# Altium PCB Copy of PCB1.PcbDoc
Units mil, origin at the board's own origin, x right, y up, seen from the top; angles counter-clockwise.
Board outline 2585 x 4135 mil, 2 copper layers (Top Layer, Bottom Layer); 71 components, 60 nets, 219 pads, 31 vias.
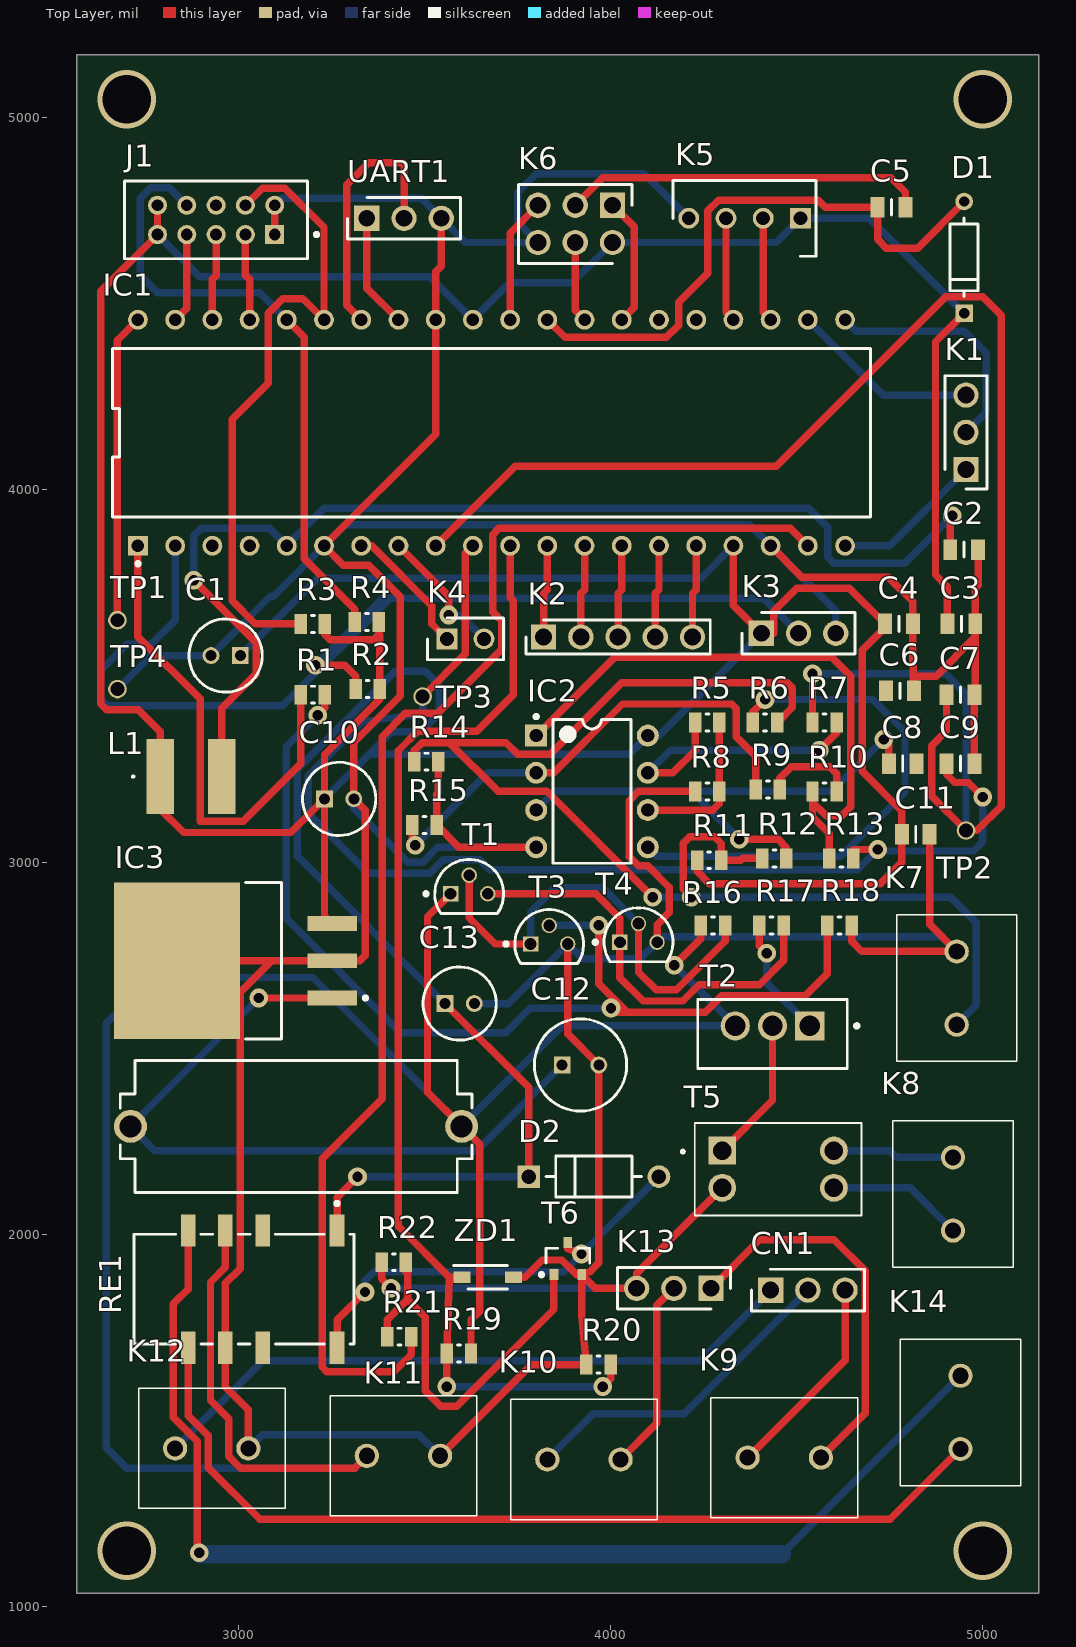
[diagram p0: Top Layer view]
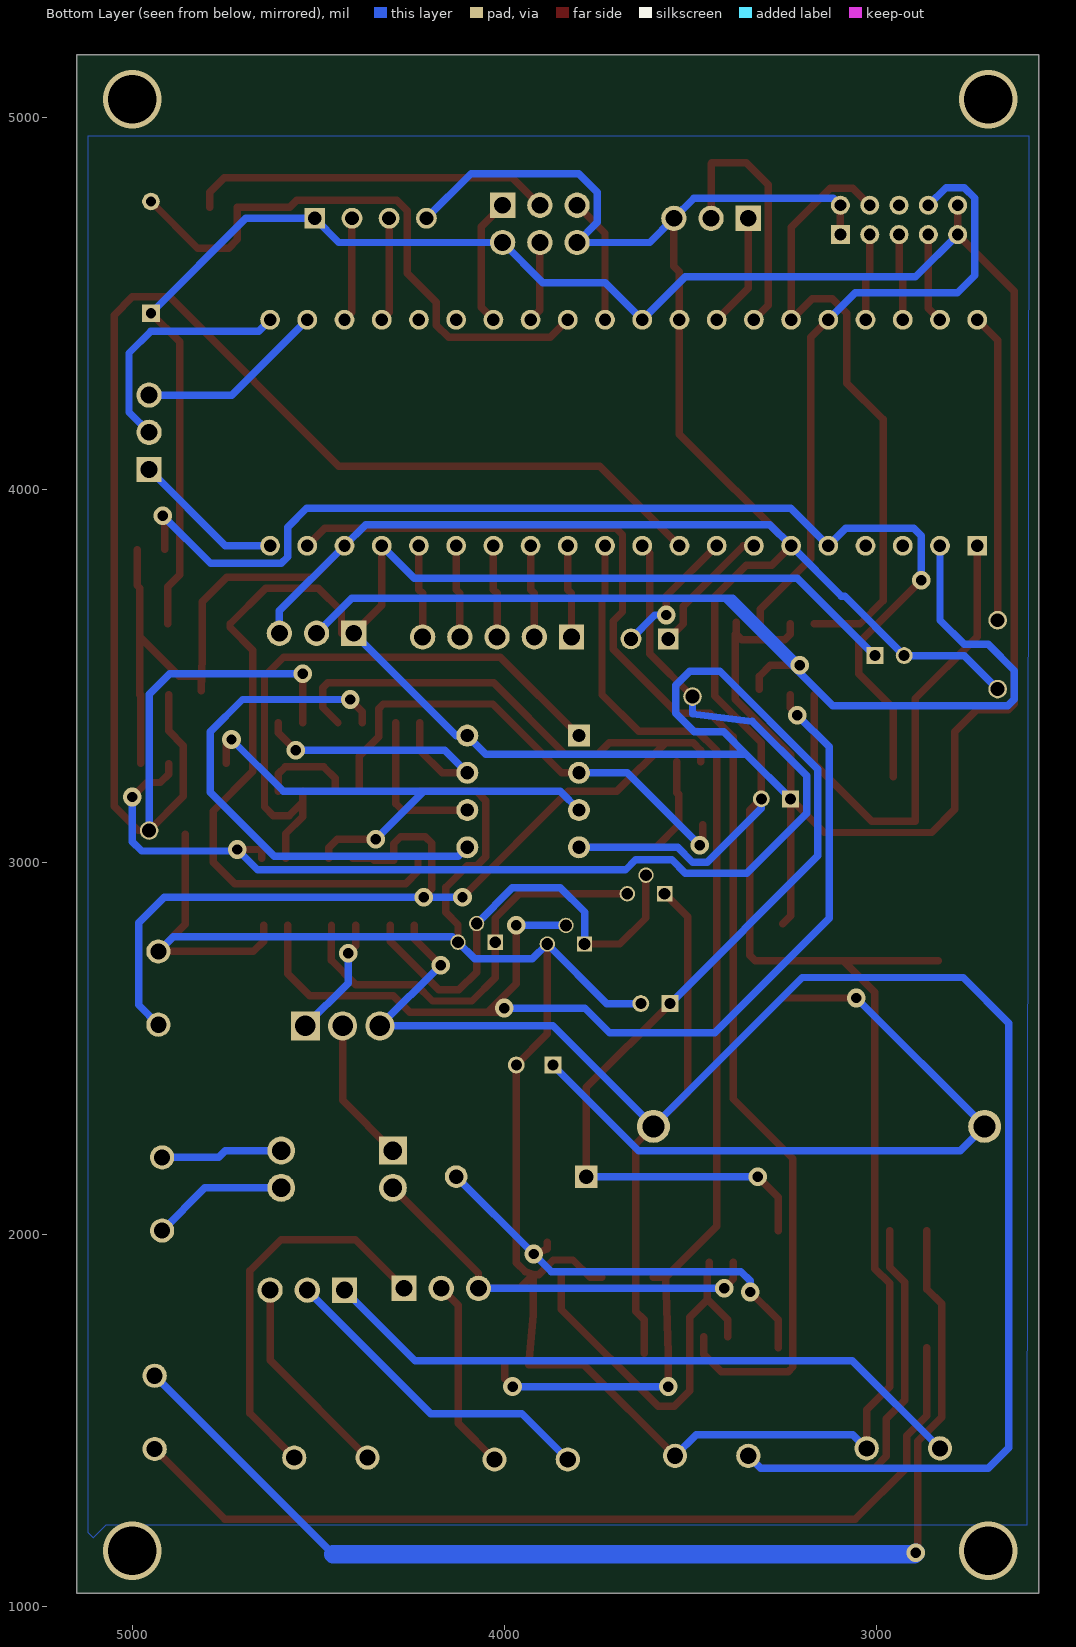
[diagram p1: Bottom Layer view, seen from below]

## Layer stack, top to bottom
Top Solder: solder mask 0.4, Solder Resist, Dk 3.5
Top Layer: signal copper 1.4
Dielectric 1: dielectric 12.6, FR-4, Dk 4.8
Bottom Layer: signal copper 1.4
Bottom Solder: solder mask 0.4, Solder Resist, Dk 3.5

## Board outline
2565,1035 5150,1035 5150,5170 2565,5170

## Design rules (kind name [scope] priority, off if disabled: settings)
Clearance [All] p1: gap=10 ignorepadtopadclearanceinfootprint=FALSE
PolygonConnect [All] p1: connectstyle=Relief reliefconductorwidth=10 reliefentries=4 polygonreliefangle="90 Angle" airgapwidth=10
RoutingVias [All] p1: holewidth=28 width=50 viastyle="Through Hole" minholewidth=28 minwidth=50 maxholewidth=28 maxwidth=50
SolderMaskExpansion [All] p1: expansion=4 istentingtop=FALSE
Width [All] p1: maxlimit=50 minlimit=15 preferedwidth=20 minimp=50.000000 maximp=50.000000 favimp=50.000000
30 further rules are at their usual default settings.

## Classes and differential pairs
component class soldeer: K8 R16 R17 R18 T1 T2 T3 T4 T5
component class IC2: C6 C7 C8 C9 C10 C11 IC2 K7 R5 R6 R7 R8 R9 R10 R11 R12 R13 R14 R15 TP2 TP3 TP4
component class CPU: C1 C2 C3 C4 C5 D1 IC1 J1 K1 K2 K3 K4 K5 K6 L1 R1 R2 R3 R4 TP1 UART1

## Components (designator, comment, footprint, x,y, rotation, side; value= is the part's Value field where it differs from the comment)
C1 "10uf 50V" "Elco 10uF 50V" 3005,3555 r180 top
C2 "100 nF" 0805 4950,3840 r0 top
C3 "100 nF" 0805 4942.4,3640 r0 top
C4 "100 nF" 0805 4775,3640 r0 top
C5 "100 nF" 0805 4755,4760 r0 top
C6 "10 nF" 0805 4777.4,3460 r0 top
C7 "10 nF" 0805 4940,3450 r0 top
C8 "10 nF" 0805 4785,3265 r0 top
C9 "10 nF" 0805 4940,3265 r0 top
C10 "10u 50V" "Elco 10uF 50V" 3231.26,3170 r0 top
C11 "10 nF" 0805 4820,3075 r0 top
C12 "100uF 25V" "Elco 100uF 25V" 3870,2455 r0 top
C13 "10uf 50V" "Elco 10uF 50V" 3555,2620 r0 top
CN1 "5-146280-3" "3 Pin Header" 4430,1850 r0 top
D1 "1N4148" 1N4148 4950,4625 r90 top
D2 "1N4007" 1N4007 3955,2155 r0 top value=15pF
IC1 "ATMEGA4809-PF" FP-C04-016-MFG 3680,4153.75 r90 top
IC2 "MCP6002-E/P" MCP6002-E/P 3950,3190 r0 top
IC3 "UA7805CKTTR" FP-KTT0003A-MFG 2925.45,2735 r90 top
J1 "DF11-10DP-2DSA(24)" "FP-DF11-10DP-2DSA_24-MFG - duplicate" 2940,4725.63 r180 top
K1 "5-146280-3" "3 Pin Header" 4955,4055 r90 top
K2 "5-146280-5" "5 Pin Header" 3820,3605 r0 top
K3 "5-146280-3" "3 Pin Header" 4405,3615 r0 top
K4 "5-146280-2" "2 Pin Header" 3560,3600 r0 top
K5 "5-146280-4" "4 Pin Header" 4510,4730 r90 top
K6 "2x3 Pin Header" "2x3 Pin Header" 4005,4765 r180 top
K7 "282836-2" "Schroefconnector 2 Pin" 4930,2563.15 r270 top
K8 "282836-2" "Schroefconnector 2 Pin" 4920,2010 r270 top
K9 "282836-2" "Schroefconnector 2 Pin" 4565,1400 r0 top
K10 "282836-2" "Schroefconnector 2 Pin" 4026.85,1395 r0 top
K11 "282836-2" "Schroefconnector 2 Pin" 3541.85,1405 r0 top
K12 "282836-2" "Schroefconnector 2 Pin" 3026.85,1425 r0 top
K13 "5-146280-3" "3 Pin Header" 4270,1855 r180 top
K14 "282836-2" "Schroefconnector 2 Pin" 4940,1620 r90 top
L1 "10uH" Smoorspoel 2872.68,3230 r0 top
R1 "200E" registor 3200,3450 r0 top
R2 "200E" registor 3347.48,3465 r0 top
R3 "200E" registor 3200,3640 r0 top
R4 "200E" registor 3345,3645 r0 top
R5 "200E" registor 4260,3375 r0 top
R6 "200E" registor 4415,3375 r0 top
R7 "200E" registor 4575,3375 r0 top
R8 "200E" registor 4260,3190 r0 top
R9 "200E" registor 4422.48,3195 r0 top
R10 "200E" registor 4575,3190 r180 top
R11 "200E" registor 4265,3005 r0 top
R12 "200E" registor 4440,3010 r180 top
R13 "200E" registor 4620,3010 r180 top
R14 "200E" registor 3505,3270 r180 top
R15 "200E" registor 3500,3100 r180 top
R16 "200E" registor 4275,2830 r180 top
R17 "200E" registor 4432.48,2830 r180 top
R18 "200E" registor 4615,2830 r180 top
R19 "200E" registor 3592.48,1680 r180 top
R20 "200E" registor 3967.48,1650 r180 top
R21 "200E" registor 3432.48,1725 r0 top
R22 "200E" registor 3417.48,1925 r180 top
RE1 "G6S-2F-DC5" FP-G6S-2F-DC5-MFG 3015,1852.52 r180 top
T1 "BC547C" BC547C 3620,2915 r0 top
T2 "IRF9Z34NPBF" IRF9Z34NPBF 4435,2560 r180 top
T3 "BC547C" BC547C 3835,2780 r0 top
T4 "BC557C" BC557C 4075,2785 r0 top
T5 "CM2545X171B-10" CM2545X171B-10 4450,2175 r0 top
T6 "BC847B" INF-SOT23_L 3885,1935 r90 top
TP1 "TP?" testpunt 2675,3650 r90 top
TP2 "TP?" testpunt 4955,3085 r90 top
TP3 "TP?" testpunt 3495,3445 r90 top
TP4 "TP?" testpunt 2675,3465 r90 top
UART1 "5-146280-3" "3 Pin Header" 3345,4730 r0 top
ZD1 "5V1" SOD3716X135N 3670,1885 r0 top
? "696101000002" zekeringhouder 3154.88,2290 r180 top

## Footprints (in the part's own frame and the unit in brackets; to place one, negate y for a bottom-side part, rotate by r counter-clockwise, add the part's x,y. Pads: shape width x height; smd on the part's side, far side on the other; paste and mask are expansions set on the pad)
1N4007 [mm]
  rect 1.55x1.55 hole 1 paste-2539.97 mask+0: 1(-4.44,0)
  round 1.55 hole 1 paste-2539.97 mask+0: 2(4.44,0)
  silkscreen extent -3.27,-1.4 3.27,1.4, body extent -5.32,-1.5 5.32,1.5, height 0.25
1N4148 [mm]
  rect 1.2x1.2 hole 0.7 paste-2539.97 mask+0: 1(-3.813,0)
  round 1.2 hole 0.7 paste-2539.97 mask+0: 2(3.813,0)
  silkscreen extent -2.68,-0.95 2.68,0.95, body extent -4.51,-1.05 4.51,1.05, height 0.25
"2 Pin Header" [mm]
  rect 1.425x1.425 hole 0.95: 1(0,0)
  round 1.425 hole 0.95: 2(2.54,0)
  silkscreen extent -1.32,-1.42 3.86,1.42, body extent -1.07,-1.17 3.61,1.17, height 8.12
"2x3 Pin Header" [mm] "HDRV6W67P254_2X3_721X488X872P"
  rect 1.725x1.725 hole 1.15: 1(0,0)
  round 1.725 hole 1.15: 2(0,2.54) 3(2.54,0) 4(2.54,2.54) 5(5.08,0) 6(5.08,2.54)
  silkscreen extent -1.32,-1.42 6.4,3.96, body extent -1.07,-1.17 6.15,3.71, height 8.12
"3 Pin Header" [mm]
  rect 1.725x1.725 hole 1.15: 1(0,0)
  round 1.725 hole 1.15: 2(2.54,0) 3(5.08,0)
  silkscreen extent -1.32,-1.42 6.4,1.42, body extent -1.07,-1.17 6.15,1.17, height 8.12
"4 Pin Header" [mm]
  rect 1.425x1.425 hole 0.95: 1(0,0)
  round 1.425 hole 0.95: 2(0,2.54) 3(0,5.08) 4(0,7.62)
  silkscreen extent -2.59,-1.06 2.59,8.68, body extent -2.33,-0.38 2.33,8, height 8.21
"5 Pin Header" [mm]
  rect 1.725x1.725 hole 1.15: 1(0,0)
  round 1.725 hole 1.15: 2(2.54,0) 3(5.08,0) 4(7.62,0) 5(10.16,0)
  silkscreen extent -1.21,-1.17 11.37,1.17, body extent -1.07,-1.17 11.23,1.17, height 8.12
0805 [mm]
  rect 0.95x1.4 smd: 1(-0.95,0) 2(0.95,0)
  silkscreen extent 0,-0.53 0,0.53, body extent -1,-0.63 1,0.63, height 0.6
BC547C [mm] "TO, 3-Leads, Body Dia 4.7mm, Pitch 1.27mm"
  rect 1.05x1.05 hole 0.8: 1(-1.27,0)
  round 1.05 hole 0.8: 2(0,1.27) 3(1.27,0)
  silkscreen extent -3.07,-1.34 2.35,2.35, body extent -2.35,-1.33 2.36,2.36, height 7.87
BC557C [mm] "TO, 3-Leads, Body Dia 4.7mm, Pitch 1.27mm"
  rect 1.05x1.05 hole 0.8: 1(-1.27,0)
  round 1.05 hole 0.8: 2(0,1.27) 3(1.27,0)
  silkscreen extent -3.07,-1.34 2.35,2.35, body extent -2.35,-1.33 2.36,2.36, height 7.87
CM2545X171B-10 [mil]
  rect 75x75 hole 50: 1(-150,50)
  round 75 hole 50: 2(-150,-50) 3(150,-50) 4(150,50)
  silkscreen extent -260,-124 224,124, body extent -224,-124 224,124, height 374
"Elco 10uF 50V" [mm] "CAPPRD200W55D500H1250"
  rect 1.15x1.15 hole 0.75: 1(0,0)
  round 1.15 hole 0.75: 2(2,0)
  silkscreen extent -1.5,-2.5 3.5,2.5, body extent -1.75,-2.75 3.75,2.75, height 12.5
"Elco 100uF 25V" [mm]
  rect 1.15x1.15 hole 0.75: 1(0,0)
  round 1.15 hole 0.75: 2(2.5,0)
  silkscreen extent -1.9,-3.15 4.4,3.15, body extent -2.15,-3.4 4.65,3.4, height 12.7
FP-C04-016-MFG [mm]
  rect 1.35x1.35 hole 0.85 paste-2539.97 mask+0: 1(-7.715,24.13)
  round 1.35 hole 0.85 paste-2539.97 mask+0: 2(-7.715,21.59) 3(-7.715,19.05) 4(-7.715,16.51) 5(-7.715,13.97) 6(-7.715,11.43) 7(-7.715,8.89) 8(-7.715,6.35) 9(-7.715,3.81) 10(-7.715,1.27) 11(-7.715,-1.27) 12(-7.715,-3.81) 13(-7.715,-6.35) 14(-7.715,-8.89) 15(-7.715,-11.43) 16(-7.715,-13.97) 17(-7.715,-16.51) 18(-7.715,-19.05) 19(-7.715,-21.59) 20(-7.715,-24.13) 21(7.715,-24.13) 22(7.715,-21.59) 23(7.715,-19.05) 24(7.715,-16.51) 25(7.715,-13.97) 26(7.715,-11.43) 27(7.715,-8.89) 28(7.715,-6.35) 29(7.715,-3.81) 30(7.715,-1.27) 31(7.715,1.27) 32(7.715,3.81) 33(7.715,6.35) 34(7.715,8.89) 35(7.715,11.43) 36(7.715,13.97) 37(7.715,16.51) 38(7.715,19.05) 39(7.715,21.59) 40(7.715,24.13)
  silkscreen extent -9.07,-25.88 5.76,25.88, body extent -8.49,-26.71 8.49,26.71, height 0.25
"FP-DF11-10DP-2DSA_24-MFG - duplicate" [mm]
  rect 1.3x1.3 hole 0.8 paste-2539.97 mask+0: 1(-4,1)
  round 1.3 hole 0.8 paste-2539.97 mask+0: 2(-4,-1) 3(-2,1) 4(-2,-1) 5(0,1) 6(0,-1) 7(2,1) 8(2,-1) 9(4,1) 10(4,-1)
  silkscreen extent -6.98,-2.65 6.25,2.65, body extent -6.35,-2.75 6.35,2.75, height 0.25
FP-G6S-2F-DC5-MFG [mm]
  rect 1x2.2 smd paste+0 mask+0: 1(-6.35,-4) 3(-1.27,-4) 4(1.27,-4) 5(3.81,-4) 8(3.81,4) 9(1.27,4) 10(-1.27,4) 12(-6.35,4)
  silkscreen extent -7.5,-5.97 7.5,3.75, body extent -7.6,-5.2 7.6,5.2, height 0.25
FP-KTT0003A-MFG [mm]
  rect 1x3.4 smd paste-1000 mask+0: 1(-2.54,-8.302) 2(0,-8.302) 3(2.54,-8.302)
  rect 10.7x8.6 smd paste-1000 mask+0: 4(0,2.298)
  silkscreen extent -5.34,-10.69 5.34,-2.38, body extent -5.45,-10.1 5.45,6.7, height 0.25
INF-SOT23_L [mm] "SOT23, 3-Leads, Body 2.9x1.3 mm, Pitch 0.95 mm, IPC High Density"
  rect 0.75x0.6 smd: 1(-1.1,0.95) 2(-1.1,-0.95) 3(1.1,0)
  silkscreen extent -1.22,-1.5 0.7,1.92, body extent -0.7,-1.5 0.7,1.5, height 1.1
IRF9Z34NPBF [mm] "TO,flange mount,2.54 mm pitch, 3 pin, 10.16 mm L X 4.57 mm W X 20.56 mm H body"
  rect 1.99x1.99 hole 1.39 paste-2539.97 mask+0: 1(-2.54,0)
  round 1.99 hole 1.39 paste-2539.97 mask+0: 2(0,0) 3(2.54,0)
  silkscreen extent -5.87,-1.8 5.1,2.9, body extent -5.16,-1.72 5.16,2.86, height 19.84
MCP6002-E/P [mm] "8-Pin Plastic Dual In-Line Package (PDIP)"
  rect 1.5x1.5 hole 0.9: 1(-3.81,3.81)
  round 1.5 hole 0.9: 2(-3.81,1.27) 3(-3.81,-1.27) 4(-3.81,-3.81) 5(3.81,-3.81) 6(3.81,-1.27) 7(3.81,1.27) 8(3.81,3.81)
  silkscreen extent -3.93,-4.9 2.65,5.23, body extent -3.55,-4.9 3.55,4.9, height 4.32
registor [mm] "Chip Resistor, 2-Leads, Body 2.00x1.25mm, IPC High Density"
  rect 0.85x1.35 smd: 1(-0.825,0) 2(0.825,0)
  silkscreen extent -0.1,-0.58 0.1,0.58, body extent -1.1,-0.72 1.1,0.72, height 0.5
"Schroefconnector 2 Pin" [mm]
  round 1.65 hole 1.1: 1(0,0) 2(-5,0)
  silkscreen extent -7.5,-4.1 2.5,4.1, body extent -8.09,-4.1 2.51,4.1, height 10.02
Smoorspoel [mm] "10uH"
  rect 1.9x5.1 smd: 1(-2.1,0) 2(2.1,0)
  silkscreen extent -4,-0.05 -3.9,0.05, body extent -3.15,-3 3.15,3, height 4.5
SOD3716X135N [mm]
  rect 1.15x0.8 smd: 1(-1.75,0) 2(1.75,0)
  silkscreen extent -2.33,-0.8 1.34,0.8, body extent -1.86,-0.8 1.86,0.8, height 1.35
testpunt [mm]
  round 1.27 hole 0.95: 1(0,0)
zekeringhouder [mm] "FUSEHOLDER BLOCKS - PCB - CLIP COVER - THT"
  round 2.25 hole 1.5: 1(-11.3,0) 2(11.3,0)
  silkscreen extent -12,-4.5 12,4.5, body extent -12,-4.5 12,4.5, height 13.55

## Part data
C1 C13: library part "Condensator 10uf 50V", Manufacturer="AVX Interconnect / Elco", Part Number=02015A270JAT2A
C2 C3 C4 C5 C6 C7 C8 C9 C11: library part "Condensator 0805", "Chip Multilayer Ceramic Capacitors for General Purpose, 0805, 10uF, X5R, 15%, 10%, 25V", Capacitance=10uF, Case Code (Imperial)=0805, Case Code (Metric)=2012, Dielectric=X5R, Max Operating Temperature=85°C, Min Operating Temperature=-55°C, Package Quantity=1, Tolerance=10%, Voltage=25V, Case/Package=0805, Depth=1.25mm, Height=1.25mm, Lead Free="Lead Free", Length=2mm, Material=Ceramic, Mount="Surface Mount", Packaging="Tape and Reel", Radiation Hardening=No, Termination=SMD/SMT, Thickness=0.053inch, Voltage Rating=25V, Voltage Rating (DC)=25V, Width=0.049inch
C10: library part "Condensator Elco", Manufacturer="AVX Interconnect / Elco", Part Number=02015A270JAT2A
C12: library part "Condensator 100uF 25V", Manufacturer="AVX Interconnect / Elco", Part Number=02015A270JAT2A
CN1: library part "3 Pin Header", "Connector 5-146280-3", Manufacturer_Name="TE Connectivity", Mouser2 Part Number=571-5-146280-3, Datasheet Link=https://componentsearchengine.com//5-146280-3.pdf, Height=8.21mm, Manufacturer_Part_Number=5-146280-3, Mouser2 Price/Stock=https://www.mouser.com/Search/Refine.aspx?Keyword=571-5-146280-3
D1: "DIODE GEN PURP 100V 200MA DO35", Average Rectified Current=200mA, Capacitance=4pF, Case/Package=DO-35, Current=4A, Forward Current=300mA, Forward Voltage=1V, Max Forward Surge Current (Ifsm)=1A, Max Operating Temperature=175°C, Max Power Dissipation=500mW, Max Repetitive Reverse Voltage (Vrrm)=100V, Max Reverse Current=5uA, Min Operating Temperature=-65°C, Package Quantity=2000, Contact Plating=Tin, Current Rating=200mA, Diameter=1.91mm, Element Configuration=Single, Height=4.56mm, Lead Free="Lead Free", Length=4.56mm, Max Reverse Voltage (DC)=100V, Max Surge Current=4A, Mount="Through Hole", Number of Pins=2, Output Current=200mA, Outside Diameter=1.85mm, Packaging=Bulk, Peak Non-Repetitive Surge Current=4A, Polarity=Standard, Power Dissipation=500mW, Radiation Hardening=No, REACH SVHC="No SVHC", Recovery Time=4ns, Reverse Recovery Time=4ns, Reverse Voltage=100V, Series=-, Voltage=100V, Voltage Rating (DC)=100V, Weight=0.01lb, Width=1.91mm
D2: "Rectifier diode 1000 V 1 A DO-41, ,", Capacitance=15pF, Forward Current=1A, Manufacturer=Diotec, Max Junction Temp=+175°C, Max Repetitive Reverse Voltage=1000V, Max Surge Forward Current=27A, Peak Reverse Current=5uA, Temperature="-50°C to +175°C", Temperature Range Low=-50°C, Automotive=No, Category=Diode, ComponentLink2Description=Datasheet, ComponentLink2URL=https://datasheet.octopart.com/1N4007-Diotec-datasheet-62346875.pdf, Device Class L1="Discrete Semiconductors", Device Class L2=Diodes, Device Class L3="Rectifier Diodes", Height=2.8mm, Ipc Land Pattern Name=DIOAD888W100L520D280, Lead Free=Yes, Manufacturer Part Number=1N4007, Octopart=https://octopart.com/1n4007-diotec-4040411, Package=1N4007, Reverse Voltage=1000V, RoHS=TRUE, Temperature Range High=+175°C
IC1: library part CMP-06276-000616-1, "IC MCU 8BIT 48KB FLASH 40DIP", RoHS Compliant=Yes
IC2: "None", Case/Package=PDIP, Input Bias Current=1pA, Input Offset Voltage (Vos)=4.5mV, Max Operating Temperature=125°C, Max Supply Voltage=6V, Min Operating Temperature=-40°C, Min Supply Voltage=1.8V, Nominal Supply Current=100uA, Operating Supply Voltage=5.5V, Output Current=23mA, Package Quantity=60, Power Supply Rejection Ratio (PSRR)=86dB, Voltage Gain=112dB, Amplifier Type="GENERAL PURPOSE", Bandwidth=1MHz, Common Mode Rejection Ratio=60dB, Gain Bandwidth Product=1MHz, Height=3.3mm, Input Offset Voltage-Max=4.5mV, Lead Free="Lead Free", Length=9.27mm, Mount="Through Hole", Number of Amplifiers=2, Number of Channels=2, Number of Circuits=2, Number of Elements=2, Number of Pins=8, Operating Supply Current=100uA, Output Current per Channel=23mA, Packaging=Rail/Tube, Radiation Hardening=No, REACH SVHC="No SVHC", RoHS Compliant=Yes, Slew Rate=0.6V/µs, Slew Rate-Nom=0.6V/µs, Supply Current=100uA, Technology=CMOS, Unity Gain Bandwidth Product=1MHz, Width=6.35mm
IC3: library part IC4, "IC REG LIN 5V 1.5A DDPAK/TO263-3", Case/Package=TO-263, Dropout Voltage=2V, Max Input Voltage=25V, Max Operating Temperature=125°C, Max Output Current=1.5A, Max Output Voltage=5.2V, Min Input Voltage=7V, Min Operating Temperature=0°C, Min Output Voltage=4.8V, Nominal Output Voltage=5V, Package Quantity=1, Power Rating=15W, Power Supply Rejection Ratio (PSRR)=78dB, Quiescent Current=8mA, Contact Plating=Tin, Height=4.83mm, Lead Free="Lead Free", Length=10.67mm, Mount="Surface Mount", Number of Outputs=1, Number of Pins=3, Number of Regulators=1, Output Current=1.5A, Output Type=Fixed, Output Voltage=5V, Packaging="Tape and Reel", Polarity=Positive, Radiation Hardening=No, REACH SVHC="No SVHC", Weight=0.050897oz, Width=9.65mm
J1: library part CMP-11610-000008-1, "CONN HEADER VERT 10POS 2MM", Current Rating=2A, Manufacturer=Hirose, Temperature="-40°C to +85°C", Temperature Range High=+85°C, Temperature Range Low=-40°C, Voltage Rating=250V, Automotive=No, Category=Conn, ComponentLink2Description=Datasheet, ComponentLink2URL=https://www.hirose.com/product/document?clcode=CL0543-0520-0-24&productname=DF11-10DP-2DSA(24)&series=DF11&documenttype=Catalog&lang=en&documentid=D31688_en, Conn Gender=Male, Conn Orientation=Straight, Contact Material=Tin,Nickel, Device Class L1=Connectors, Device Class L2="Headers and Wire Housings", Device Class L3=unset, Digikey Description="CONN HEADER VERT 10POS 2MM", Footprint Url=https://www.hirose.com/product/document?clcode=CL0543-0520-0-24&productname=DF11-10DP-2DSA(24)&series=DF11&documenttype=2DDrawing&lang=en&documentid=0000995333, Height=6.9mm, Lead Free=Yes, Manufacturer Part Number=DF11-10DP-2DSA(24), Mouser Description="Headers & Wire Housings 10P STRT HEADER THRU HL,BD MNT,SN", Number Of Contacts=10, Number Of Rows=2, Octopart=https://octopart.com/df11-10dp-2dsa%2824%29-hirose-39521433, Package=DF11-10DP-2DSA(24), Pitch=2mm, RoHS=TRUE
K1 K3 K13 UART1: library part "3 Pin Header L", "Connector 5-146280-3", Manufacturer_Name="TE Connectivity", Mouser2 Part Number=571-5-146280-3, Datasheet Link=https://componentsearchengine.com//5-146280-3.pdf, Height=8.21mm, Manufacturer_Part_Number=5-146280-3, Mouser2 Price/Stock=https://www.mouser.com/Search/Refine.aspx?Keyword=571-5-146280-3
K2: library part "5 Pin Header", "Connector 5-146280-5", Manufacturer_Name="TE Connectivity", Mouser2 Part Number=571-5-146280-5, Datasheet Link=https://componentsearchengine.com//5-146280-5.pdf, Height=8.21mm, Manufacturer_Part_Number=5-146280-5, Mouser2 Price/Stock=https://www.mouser.com/Search/Refine.aspx?Keyword=571-5-146280-5
K4: library part "2 Pin Header L", "Connector", Manufacturer_Name="TE Connectivity", Datasheet Link=http://www.te.com/commerce/DocumentDelivery/DDEController?Action=showdoc&DocId=Customer+Drawing%7F146280%7FH2%7Fpdf%7FEnglish%7FENG_CD_146280_H2.pdf%7F5-146280-2, Height=8.72mm, Manufacturer_Part_Number=5-146280-2
K5: library part "4 Pin Header L", "Connector 5-146280-4", Manufacturer_Name="TE Connectivity", Datasheet Link=https://datasheet.datasheetarchive.com/originals/distributors/DKDS-20/396066.pdf, Height=8.21mm, Manufacturer_Part_Number=5-146280-4
K6: "Connector", Manufacturer_Name="TE Connectivity", Manufacturer_Part_Number=5-146256-3, Datasheet Link=https://www.te.com/commerce/DocumentDelivery/DDEController?Action=srchrtrv&DocNm=146256&DocType=Customer+Drawing&DocLang=English, Height=8.72mm
K7 K8 K9 K10 K11 K12 K14: library part "Schroefconnector 2 Pin L", "Connector", Manufacturer_Name="TE Connectivity", Datasheet Link=https://www.te.com/commerce/DocumentDelivery/DDEController?Action=showdoc&DocId=Customer+Drawing%7F282836%7FJ%7Fpdf%7FEnglish%7FENG_CD_282836_J.pdf%7F282836-2, Height=10mm, Manufacturer_Part_Number=282836-2
L1: library part Smoorspoel, "Inductor VLS6045EX-100M-H", Manufacturer_Name=TDK, Manufacturer_Part_Number=VLS6045EX-100M-H, Mouser2 Part Number=810-VLS6045EX-100M-H, Datasheet Link=https://componentsearchengine.com//VLS6045EX-100M-H.pdf, Mouser2 Price/Stock=https://www.mouser.com/Search/Refine.aspx?Keyword=810-VLS6045EX-100M-H
R1 R2 R3 R4 R5 R6 R7 R8 R9 R10 R11 R12 R13 R14 R15 R16 R17 R18 R19 R20 R21 R22: library part resistor, Manufacturer="Vishay Dale", Part Number=CRCW08050000Z0EA
RE1: library part CMP-08823-000012-1, "RELAY TELECOM DPDT 2A 5VDC", Ambient Temperature Range High=+85°C, Ambient Temperature Range Low=-40°C, Coil Current=28.1mA, Coil Power=140mW, Coil Resistance=178Ω, Coil Voltage=5V, Current Rating=2A, Manufacturer=Omron, Temperature="-40°C to +85°C", Automotive=No, Category=Relay, Coil Type=Non-Latching, ComponentLink2Description=Datasheet, ComponentLink2URL=https://omronfs.omron.com/en_US/ecb/products/pdf/en-g6s.pdf, Device Class L1=Electromechanical, Device Class L2=Relays, Device Class L3="Signal Relays", Digikey Description="RELAY TELECOM DPDT 2A 5VDC", Height=9.4mm, Lead Free=Yes, Manufacturer Part Number=G6S-2F-DC5, Mouser Description="Electromechanical Relay 5VDC 178Ohm 2A DPDT (14.8x9.2x9.2)mm SMD Signal Relay", Number Of Contacts=2, Octopart=https://octopart.com/g6s-2f-dc5-omron-85236, Package=G6S-2F-DC5, RoHS=TRUE, Standoff Height=0.35mm, Switching Current=2A, Temperature Range High=+85°C, Temperature Range Low=-40°C, Throw Configuration=DPDT
T1 T3: "Amplifier Transistor, NPN Silicon, 3-Pin TO-92, Pb-Free, Bulk Box", Manufacturer="On Semiconductor", PartNumber=BC547CG, ComponentLink1Description="Manufacturer URL", ComponentLink1URL=http://www.onsemi.com/, ComponentLink2Description=Datasheet, ComponentLink2URL=http://www.onsemi.com/pub_link/Collateral/BC546-D.PDF, ComponentLink3Description="Package Specification", ComponentLink3URL=http://www.onsemi.cn/pub_link/Collateral/2N6426-D.PDF, DatasheetVersion="Rev. 7", fT Min (MHz)=150, IC Continuous (A)=0.1, Mounting Technology="Through Hole", PackageDescription="3-Pin Transistor Outline, Body 4.825 x 3.685 mm, Pitch 1.27 mm", PackageReference=TO-92-3-29-11_AM_SL, PackageVersion="Rev. AM", Packing="Bulk Box", Polarity=NPN, RoHS=TRUE
T2: "OptiMOS - P2 Power-Transistor, P-channel-Enhancement mode, VDS -30V", Manufacturer="Infineon Technologies", Manufacturer Order NumberManufacturer Order Number=IRF9Z34N, PackageReference=PG-TO220-3-904
T4: "Amplifier Transistor, PNP Silicon, 3-Pin TO-92, Bulk Box", Manufacturer="On Semiconductor", ComponentLink1Description="Manufacturer URL", ComponentLink1URL=http://www.onsemi.com/, ComponentLink2Description=Datasheet, ComponentLink2URL=http://www.onsemi.com/pub_link/Collateral/BC556B-D.PDF, ComponentLink3Description="Package Specification", ComponentLink3URL=http://www.onsemi.cn/pub_link/Collateral/2N6426-D.PDF, DatasheetVersion="Rev. 3", IC Continuous (A)=-0.1, Mounting Technology="Through Hole", PackageDescription="3-Pin Transistor Outline, Body 4.825 x 3.685 mm, Pitch 1.27 mm", PackageReference=TO-92-3-29-11_AM_SL, PackageVersion="Rev. AM", Packing="Bulk Box", PartNumber=BC557C, Polarity=PNP, RoHS=FALSE
T5: "2 Line Common Mode Choke Through Hole 170 Ohms @ 100 MHz 10A DCR 10mOhm", Package="Vertical-4 Laird", Availability="In Stock", Check_prices=https://www.snapeda.com/parts/CM2545X171B-10/Laird/view-part/?ref=eda, MF=Laird, MP=CM2545X171B-10, Price=None, Purchase-URL=https://pricing.snapeda.com/search/part/CM2545X171B-10/?ref=eda, SnapEDA_Link=https://www.snapeda.com/parts/CM2545X171B-10/Laird/view-part/?ref=snap
T6: "NPN Silicon AF Transistor, 45 V VCEO, 100 mA IC, SOT23, Reel, Green", Manufacturer=Infineon, ComponentLink1Description="Manufacturer URL", ComponentLink1URL=http://www.infineon.com/, ComponentLink2Description=Datasheet, ComponentLink2URL=http://www.infineon.com/dgdl/bc847series_bc848series_bc849series_bc850series.pdf?folderId=db3a304314dca389011541d30fa21656&fileId=db3a304314dca389011541d4630a1657, ComponentLink3Description="Package Specification", ComponentLink3URL=http://www.infineon.com/dgdl/SOT23-Package_Overview.pdf?folderId=db3a30431936bc4b0119532290053c66&fileId=db3a30431936bc4b0119533468123c85, fT (typ)="250Â MHz", Green=TRUE, IBM (max)="200Â mA", IC (max)="100Â mA", ICBO (max)="15Â nA", ICM (max)="200Â mA", Mounting Technology="Surface Mount", PackageDescription="3-Pin Small Outline Transistor Package, 1.3 x 2.9 mm Body, 0.95 mm Pitch", PackageReference=SOT23, PackageVersion=Apr-08, Packing=Reel, PartNumber=BC847B, Polarity=NPN, Ptot (max)="330Â mW", VCBO (max)="50Â V", VCEO (max)="45Â V", VEBO (max)="6Â V"
TP1 TP2 TP3 TP4: library part testpunt
ZD1: library part MMSZ4689T1G, "Zener Diode", Manufacturer_Name="ON Semiconductor", Mouser Part Number=863-MMSZ4689T1G, Arrow Part Number=MMSZ4689T1G, Arrow Price/Stock=https://www.arrow.com/en/products/mmsz4689t1g/on-semiconductor, Datasheet Link=http://www.onsemi.com/pub/Collateral/MMSZ4678T1-D.PDF, Height=1.35mm, Manufacturer_Part_Number=MMSZ4689T1G, Mouser Price/Stock=https://www.mouser.co.uk/ProductDetail/ON-Semiconductor/MMSZ4689T1G/?qs=P4IOph%252Bbot%252Blaz%2FZtdyBaA%3D%3D
?: library part zekeringhouder, "WR-FSH Fuseholder THT Blocks PCB Clip Cover", Manufacturer="Wurth Elektronik", Operating Temperature Max=120°C, Operating Temperature Min=-30°C, Category="Fuse Holder", ComponentLink1Description="Website Link", ComponentLink1URL=https://www.we-online.com/redexpert/article/696101000002?ad, ComponentLink2Description="Datasheet Link", ComponentLink2URL=https://www.we-online.com/redexpert/spec/696101000002?ad, Fuse Size=5x20mm, Manufacturer Part Number=696101000002, Match Code=WR-FSH, Mount=THT, Packaging=Box

## Via types
v1: diameter 50, hole 28, Top Layer to Bottom Layer, 27 vias
v2: diameter 157.48/157.48 (per signal layer), hole 129.92, Top Layer to Bottom Layer, 4 vias

## Nets (pads, with @x,y where several pads share a name; then routed paths per layer and width w, separated by ;. In a path a pad name is that pad's centre, name@x,y a point inside that pad or via, vN(x,y) a via of type N, cw(c..) or ccw(c..) an arc to the next point about the centre after c; other vN are vias at no path point)
+5: C1.1 C3.1 C4.1 C10.1 C11.1 C13.1 D1.1 D2.1 IC1.17 IC1.31 IC2.8 IC3.3 J1.9 J1.10 K3.1 K5.1 K6.2 L1.1 R2.2 R3.2 R4.2 R11.1 RE1.1 | length 14388.8
  Top Layer w20: J1.10 J1.9 2630,4533.74 2630,3425 2646,3409 2731,3409 2790,3350 L1.1 2790,3142.19 2852.58,3079.61 3140.87,3079.61 C10.1 ; R3.2 3232.48,3612.5 3246.98,3598 3362.98,3598 3377.48,3612.5 3377.48,3615.48 ; IC3.3 3231.26,2856.06 C10.1 ; RE1.1 3265,2100 v1(3320,2155) ; R4.2 3377.48,3615.48 ; C13.1 3780.2,2394.8 D2.1 ; R11.1 4232.52,2975 4265.52,2942 4724.6,2942 4782.6,3000 C11.1 4782.6,3137.4 4676,3244 4676,3569.4 4737.6,3631 C4.1 4641.6,3736 4500,3736 4438,3674 4438,3615 K3.1 4330,3690 IC1.17 ; C3.1 4905,3740 4873,3772 4873,4397.88 D1.1 ; C10.1 3231.26,3288.8 3379.96,3437.5 R2.2 3379.96,3613 3377.48,3615.48
  Bottom Layer w20: J1.9 2895.78,4573 3514.5,4573 IC1.31 3729.5,4557 3897,4557 K6.2 4445,4665 K5.1 4694.88,4730 D1.1 ; C1.1 3213,3763 4243,3763 IC1.17 ; C10.1 3351.26,3290 ; v1(3320,2155) D2.1 ; C13.1 3158,3017 3158,3250 3421,3513 3502,3513 3540,3475 3540,3400 3490,3350 3411.26,3350 3351.26,3290 ; K3.1 4130,3340 IC2.8 4050,3290 3351.26,3290
GND: C1.2 C2.2 C3.2 C4.2 C6.2 C7.2 C9.2 C10.2 C11.2 C12.2 C13.2 IC1.6 IC1.18 IC1.32 IC2.4 IC3.2 IC3.4 J1.1 J1.2 K3.3 K5.4 K6.6 K7.2 K11.1 K12.1 K13.3 R8.1 R14.1 R15.1 R18.1 R20.2 R22.2 RE1.9 T3.3 T4.3 T5.2 T6.2 TP4.1 UART1.3 ZD1.2 | length 17037.7
  Top Layer w20: IC3.4 3090,2735 ; K12.1 3026.85,1529 2965,1590.85 RE1.9 2965,1868 3005,1908 3005,2650 3090,2735 ; J1.1 J1.2 ; R22.2 3385,1880 v1(3410,1855) ; R14.1 3537.48,3187 3532.48,3182 R15.1 3592.48,3040 IC2.4 ; K11.1 3786.85,1650 R20.2 3922.4,1783.6 T6.2 ; UART1.3 3545,4601 3530,4586 IC1.32 3530,4150 IC1.6 3282,3798 3350,3798 3435,3713 3435,3446.38 3310,3321.38 C10.2 3341,3139 3341,2750 3326,2735 IC3.2 3090,2735 ; ZD1.2 3770,1885 3816,1931 3869.28,1931 3908.58,1891.69 T6.2 ; T3.3 3885,2538.43 C12.2 3968.43,1923.61 3944.81,1900 T6.2 ; T4.3 4125,2832 4158,2865 4158,2932 4100,2990 4075,2990 4050,3015 4050,3165 4075,3190 R8.1 ; T5.2 4070,1895 K13.3 3959.09,1855 T6.2 ; IC1.18 4514,3766 4746,3766 4812.4,3699.6 C4.2 4812.4,3552.8 C6.2 4814.8,3500 4874.5,3500 4979.8,3605.3 ; R18.1 4647.48,2787.52 4675,2760 K7.2 4857.4,2832.6 C11.2 ; C9.2 C7.2 4979.8,3450 4979.8,3605.3 ; C2.2 4987.4,3743.6 4979.8,3736 C3.2 4979.8,3605.3
  Bottom Layer w20: TP4.1 2765,3555 C1.2 3086.26,3715 3095,3715 IC1.6 3287,3907 4373,3907 IC1.18 4605,3675 K3.3 ; K12.1 3063.85,1462 3484.85,1462 K11.1 ; J1.2 3116.48,4784 3491,4784 UART1.3 3610,4665 K6.6 3751,4719 3751,4800 3801,4850 4090,4850 K5.4 ; C10.2 3310,3145 3455,3000 3495,3000 3535,3040 IC2.4 ; v1(3410,1855) K13.3 ; C13.2 3725,2620 T3.3 3925,2740 4080,2740 T4.3 4140,2800 4890,2800 K7.2
Net_1: ?.1 K11.2 R16.2 R19.1 RE1.4 T1.1 T2.3 | length 6631.3
  Top Layer w20: RE1.4 2965,1911 2925,1871 2925,1554 2974,1505 2974,1403.63 3005.63,1372 3312,1372 K11.2 ; T1.1 3508,2853 3508,2381.76 ?.1 3648,2241.76 3648,1793.04 3624.96,1770 R19.1 ; v1(4171.5,2723.5) 4242.52,2794.52 R16.2
  Bottom Layer w20: K11.2 3312,1372 2700,1372 2645,1427 2645,2567 2768,2690 3199.76,2690 ?.1 3869.76,2560 T2.3 v1(4171.5,2723.5)
Net_2: ?.2 C12.1 IC3.1 | length 1967.4
  Top Layer w20: v1(3055,2635) IC3.1
  Bottom Layer w20: v1(3055,2635) ?.2 2775,2225 3640,2225 C12.1
NetC2_1: C2.1 IC1.5 L1.2 | length 3117
  Top Layer w20: v1(2880,3757) 3048,3589 3048,3506 2955.35,3413.35 L1.2 ; C2.1 4912.6,3925.6 v1(4918,3931)
  Bottom Layer w20: v1(2880,3757) 2880,3877 2900,3897 3083,3897 IC1.5 3231,3951 4532,3951 4583,3900 4583,3820 4600,3803 4790,3803 v1(4918,3931)
NetC5_1: C5.1 D1.2 IC1.29 | length 1582.7
  Top Layer w20: IC1.29 3877.5,4410 4150,4410 4183,4443 4183,4504 4261,4582 4261,4750 4290,4779 4558,4779 4577,4760 C5.1 4717.6,4673.28 4740.88,4650 4824.88,4650 D1.2
NetC5_2: C5.2 K6.3 | length 974.2
  Top Layer w20: K6.3 3979,4839 4753.4,4839 4792.4,4800 C5.2
NetC7_1: C7.1 IC1.9 R7.1 TP2.1 | length 4609.5
  Top Layer w20: IC1.9 3744,4064 4445,4064 4900,4519 5000,4519 5049.16,4469.84 5049.16,3150 4984.16,3085 TP2.1 4862.8,3177.2 4862.8,3312.8 4902.6,3352.6 C7.1 ; R7.1 v1(4542.52,3506)
  Bottom Layer w20: v1(4542.52,3506) 4900,3506 4955,3451 TP2.1
NetC8_1: C8.1 IC2.3 R12.1 | length 1429.1
  Top Layer w20: v1(4346,3061) 4450,3061 4472.48,3038.52 R12.1 ; v1(4733.5,3329.5) 4747.6,3315.4 C8.1
  Bottom Layer w20: IC2.3 3850,3190 4217,3190 ; v1(4346,3061) 4217,3190 ; v1(4733.5,3329.5) 4594,3190 4217,3190
NetC9_1: C9.1 IC1.10 R13.1 TP3.1 | length 3280.5
  Top Layer w20: TP3.1 3610,3560 3610,3830 IC1.10 ; R13.1 4652.48,3034 v1(4718,3034) v1@4718,3030 ; C9.1 4902.6,3236.4 4925,3214 4961,3214 v1(5000,3175)
  Bottom Layer w20: TP3.1 3495,3398 3334,3378 3188,3232 3188,3131 3349,2970 3514,2970 3550,3006 3648,3006 3675,2979 4663,2979 v1(4718,3034) ; v1@4718,3030 4975,3030 5000,3055 v1(5000,3175)
NetCN1_1: CN1.1 K12.2 | length 1776
  Bottom Layer w20: K12.2 3065.45,1660.45 4240.45,1660.45 CN1.1
NetCN1_2: CN1.2 K10.2 | length 888.5
  Bottom Layer w20: K10.2 3953,1518 4198,1518 CN1.2
NetCN1_3: CN1.3 K9.2 | length 558.5
  Top Layer w20: K9.2 4630,1661.85 CN1.3
NetD2_2: D2.2 RE1.12 T6.3 | length 1173.6
  Top Layer w20: RE1.12 3265,1770 v1(3340,1845) ; T6.3 3885,1961 v1(3921.9,1947.1)
  Bottom Layer w20: v1(3340,1845) 3340,1875 3365,1900 3874.8,1900 v1(3921.9,1947.1) D2.2
NetIC1_1: IC1.1 R1.1 | length 1330
  Top Layer w20: IC1.1 2730,3606 2897,3439 2897,3109.61 3013,3109.61 3167.52,3264.13 R1.1
NetIC1_2: IC1.2 K3.2 R2.1 | length 3004.4
  Top Layer w20: v1(3207,3529) 3286,3529 3315,3500 R2.1
  Bottom Layer w20: IC1.2 2830,3650 2765,3585 2700,3585 2630,3515 2630,3437.5 2647.5,3420 3118.54,3420 3407.54,3709 ; v1(3207,3529) 3387,3709 3407.54,3709 ; K3.2 4411,3709 3407.54,3709
NetIC1_7: IC1.7 K4.1 | length 361.7
  Top Layer w20: IC1.7 3358,3850 3520,3688 3520,3640 K4.1
NetIC1_8: IC1.8 K4.2 | length 363.4
  Top Layer w20: IC1.8 3565,3715 v1(3565,3664)
  Bottom Layer w20: v1(3565,3664) 3596,3664 K4.2
NetIC1_11: IC1.11 R19.2 R20.1 ZD1.1 | length 3059.9
  Top Layer w20: v1(3560,1591) R19.2 3567,1885 ; ZD1.1 3567,1885 ; IC1.11 3730,3711.1 3738.05,3703.05 3738.05,3450 3639.85,3351.8 3481.8,3351.8 3430,3300 3430,2022 3567,1885 ; v1(3978.46,1591) 3999.96,1612.5 R20.1
  Bottom Layer w20: v1(3560,1591) v1(3978.46,1591)
NetIC1_12: IC1.12 K2.1 | length 249.1
  Top Layer w20: K2.1 3820,3722 3830,3732 IC1.12
NetIC1_13: IC1.13 K2.2 | length 249.1
  Top Layer w20: K2.2 3920,3722 3930,3732 IC1.13
NetIC1_14: IC1.14 K2.3 | length 249.1
  Top Layer w20: K2.3 4020,3722 4030,3732 IC1.14
NetIC1_15: IC1.15 K2.4 | length 249.1
  Top Layer w20: K2.4 4120,3722 4130,3732 IC1.15
NetIC1_16: IC1.16 K2.5 | length 249.1
  Top Layer w20: K2.5 4220,3722 4230,3732 IC1.16
NetIC1_19: IC1.19 R21.2 | length 3683
  Top Layer w20: R21.2 3464.96,1678 3417.96,1631 3237.5,1631 3225,1643.5 3225,2203 3386,2364 3386,3337.38 3448.62,3400 3535.55,3400 3708.05,3572.5 3708.05,3648 3683,3673.05 3683,3880 3700,3897 4483,3897 IC1.19
NetIC1_20: IC1.20 K1.1 | length 409.9
  Bottom Layer w20: IC1.20 4750,3850 K1.1
NetIC1_21: IC1.21 K1.2 | length 651.4
  Bottom Layer w20: IC1.21 4660.5,4427 4950,4427 5009,4368 5009,4209 K1.2
NetIC1_22: IC1.22 K1.3 | length 508.9
  Bottom Layer w20: IC1.22 4732.5,4255 K1.3
NetIC1_23: IC1.23 K5.2 | length 280.8
  Top Layer w20: K5.2 4410,4477.5 IC1.23
NetIC1_24: IC1.24 K5.3 | length 280.8
  Top Layer w20: K5.3 4310,4477.5 IC1.24
NetIC1_27: IC1.27 K6.1 | length 345.2
  Top Layer w20: K6.1 4063,4707 4063,4490.5 IC1.27
NetIC1_28: IC1.28 K6.4 | length 217.9
  Top Layer w20: K6.4 3905,4482.5 IC1.28
NetIC1_30: IC1.30 K6.5 | length 338.6
  Top Layer w20: IC1.30 3730,4690 K6.5
NetIC1_33: IC1.33 UART1.1 | length 307.7
  Top Layer w20: UART1.1 3345,4542.5 IC1.33
NetIC1_34: IC1.34 UART1.2 | length 704.9
  Top Layer w20: IC1.34 3291,4496.5 3291,4820 3350,4879 3443,4879 3445,4877 UART1.2
NetIC1_35: IC1.35 J1.4 R3.1 | length 1735.2
  Top Layer w20: J1.4 3064.74,4811 3125,4811 3230,4706 IC1.35 3173.5,4514 3119,4514 3080,4475 3080,4287 2983,4190 2983,3702 3045,3640 R3.1
NetIC1_36: IC1.36 J1.8 R4.1 | length 1695.2
  Top Layer w20: IC1.36 3177,4410.5 3177,3815 3312.52,3679.48 R4.1
  Bottom Layer w20: J1.8 2813.76,4812.5 2764.76,4812.5 2736,4783.74 2736,4577 2783,4530 3057.5,4530 IC1.36
NetIC1_37: IC1.37 J1.3 | length 233.4
  Top Layer w20: J1.3 3018.74,4577.26 3030,4566 IC1.37
NetIC1_38: IC1.38 J1.5 | length 232.9
  Top Layer w20: IC1.38 2930,4566 2940,4576 J1.5
NetIC1_39: IC1.39 J1.7 | length 241.7
  Top Layer w20: IC1.39 2861.26,4488.76 J1.7
NetIC1_40: IC1.40 TP1.1 | length 830.3
  Top Layer w20: TP1.1 2675,4402.5 IC1.40
NetIC2_1: IC2.1 R10.2 R13.2 | length 1630.7
  Top Layer w20: IC2.1 4011.04,3551.04 4593.96,3551.04 4645,3500 4645,3149 4621,3125 4579,3125 4542.52,3161.48 ; R10.2 4542.52,3161.48 ; R13.2 4587.52,3077 4542.52,3122 4542.52,3161.48
NetIC2_2: IC2.2 R9.1 R15.2 | length 1322.7
  Top Layer w20: R15.2 3467.52,3052.48 v1(3475,3045) ; IC2.2 3847,3240 4032,3425 4325.5,3425 4338,3412.5 4338,3337 4390,3285 R9.1
  Bottom Layer w20: v1(3475,3045) 3670,3240 IC2.2
NetIC2_5: IC2.5 R6.1 | length 1421.7
  Top Layer w20: R6.1 4382.52,3404.52 v1(4415,3437)
  Bottom Layer w20: IC2.5 4124,3016 4619,3016 4791,3188 4791,3350 4704,3437 v1(4415,3437)
NetIC2_6: IC2.6 R5.2 R8.2 | length 417.2
  Top Layer w20: IC2.6 4275,3140 4292.48,3157.48 R8.2 R5.2
NetIC2_7: IC2.7 R5.1 R7.2 | length 806.9
  Top Layer w20: IC2.7 4167.52,3240 4227.52,3300 R5.1 ; v1(4561,3301) 4607.48,3347.48 R7.2
  Bottom Layer w20: IC2.7 4161,3301 v1(4561,3301)
NetK7_1: K7.1 R6.2 R11.2 R12.2 R14.2 | length 3632.7
  Top Layer w20: R14.2 3472.52,3300 ; v1(4113,2906) 3829,3190 3698,3190 3567,3321 ; v1(4217,2906) 4195,2928 4195,3050.5 4212.5,3068 4279.48,3068 4297.48,3050 R11.2 4350,3005 4355,3010 R12.2 ; R6.2 4488,3415.52 4488,3469 4475,3482 4029.5,3482 3837.5,3290 3750,3290 3719,3321 3567,3321 ; 3472.52,3300 3472.52,3300.09 3493.43,3321 3493.52,3321 ; 3472.52,3300 3493.52,3321 ; 3493.52,3321 3567,3321
  Bottom Layer w20: v1(4113,2906) v1(4217,2906) 4914,2906 4983,2837 4983,2616.15 K7.1
NetK8_1: K8.1 T5.3 | length 367.6
  Bottom Layer w20: T5.3 4805,2125 K8.1
NetK8_2: K8.2 T5.4 | length 327.5
  Bottom Layer w20: T5.4 4750,2225 4768.15,2206.85 K8.2
NetK9_1: K9.1 K13.1 | length 1054.3
  Top Layer w20: K13.1 4401,1986 4600,1986 4684,1902 4684,1519 K9.1
NetK10_1: K10.1 K13.2 | length 519.3
  Top Layer w20: K10.1 4124,1492.15 4124,1809 K13.2
NetK14_1: K14.1 RE1.5 | length 3157
  Top Layer w20: RE1.5 2865,1853 2825,1813 2825,1508 2889.38,1443.62 2889.38,1149.62 v1(2895,1144)
  Bottom Layer w20: 4460,1140 K14.1
  Bottom Layer w50: v1(2895,1144) 2899,1140 4460,1140
NetK14_2: K14.2 RE1.8 | length 2500.1
  Top Layer w20: RE1.8 2865,1513 2919.38,1458.62 2919.38,1373.25 3057.63,1235 4751.85,1235 K14.2
NetR1_2: R1.2 R18.2 T3.2 | length 2828.5
  Top Layer w20: v1(3213,3395) 3232.48,3414.48 R1.2 ; v1(3968.26,2830) 3968.26,2673.42 4044.71,2596.97 ; v1(4001,2608) 4012.03,2596.97 4044.71,2596.97 ; R18.2 4582.52,2700 4523.52,2641 4298.73,2641 4254.71,2596.97 4044.71,2596.97
  Bottom Layer w20: v1(3213,3395) 3128,3310 3128,2849 3435,2542 3718,2542 3784,2608 v1(4001,2608) ; T3.2 v1(3968.26,2830)
NetR9_2: R9.2 R10.1 | length 250.3
  Top Layer w20: R9.2 4454.96,3225 4485.73,3255.77 4589.23,3255.77 4607.48,3237.52 R10.1
NetR16_1: R16.1 T1.2 T3.1 T4.2 | length 1230.8
  Top Layer w20: T1.2 3620,2850 3690,2780 T3.1 ; T4.2 4075,2704.71 4122.71,2657 4177,2657 4307.48,2787.48 R16.1
  Bottom Layer w20: T3.1 3785,2866 3850,2931 3979,2931 T4.2
NetR17_1: R17.1 T1.3 T4.1 | length 1147.5
  Top Layer w20: T1.3 3960,2915 4025,2850 T4.1 4025,2689.47 4087.5,2626.97 4193.47,2626.97 4237.5,2671 4400.04,2671 4465,2735.96 4465,2799.88 4464.96,2799.92 R17.1
NetR17_2: R17.2 T2.1 | length 325.9
  Top Layer w20: R17.2 4400,2775 v1(4420,2755)
  Bottom Layer w20: v1(4420,2755) 4420,2675 T2.1
NetR21_1: R21.1 R22.1 T6.1 | length 1057.3
  Top Layer w20: R21.1 3400,1770 3455,1825 ; R22.1 3449.96,1900 3455,1900 3455,1825 ; T6.1 3847.6,1798 3587.1,1537.5 3544.1,1537.5 3502,1579.6 3502,1777 3455,1824 3455,1825
NetT2_2: T2.2 T5.1 | length 390.9
  Top Layer w20: T5.1 4435,2360 T2.2
pads on no net: C6.1 C8.2 IC1.3 IC1.4 IC1.25 IC1.26 J1.6 RE1.3 RE1.10
copper on no net:
  other v2: 2700,1150 5000,1150 2700,5050 5000,5050

## Polygon pours and split planes (outlines as drawn)
GND on Bottom Layer "NONET_L02_P000" (solid, shelved, pour order 0): 2590,4950 5120,4950 5120,1200 5105,1185 5070,1220 2595,1220